# Allegro board B07_1020.brd
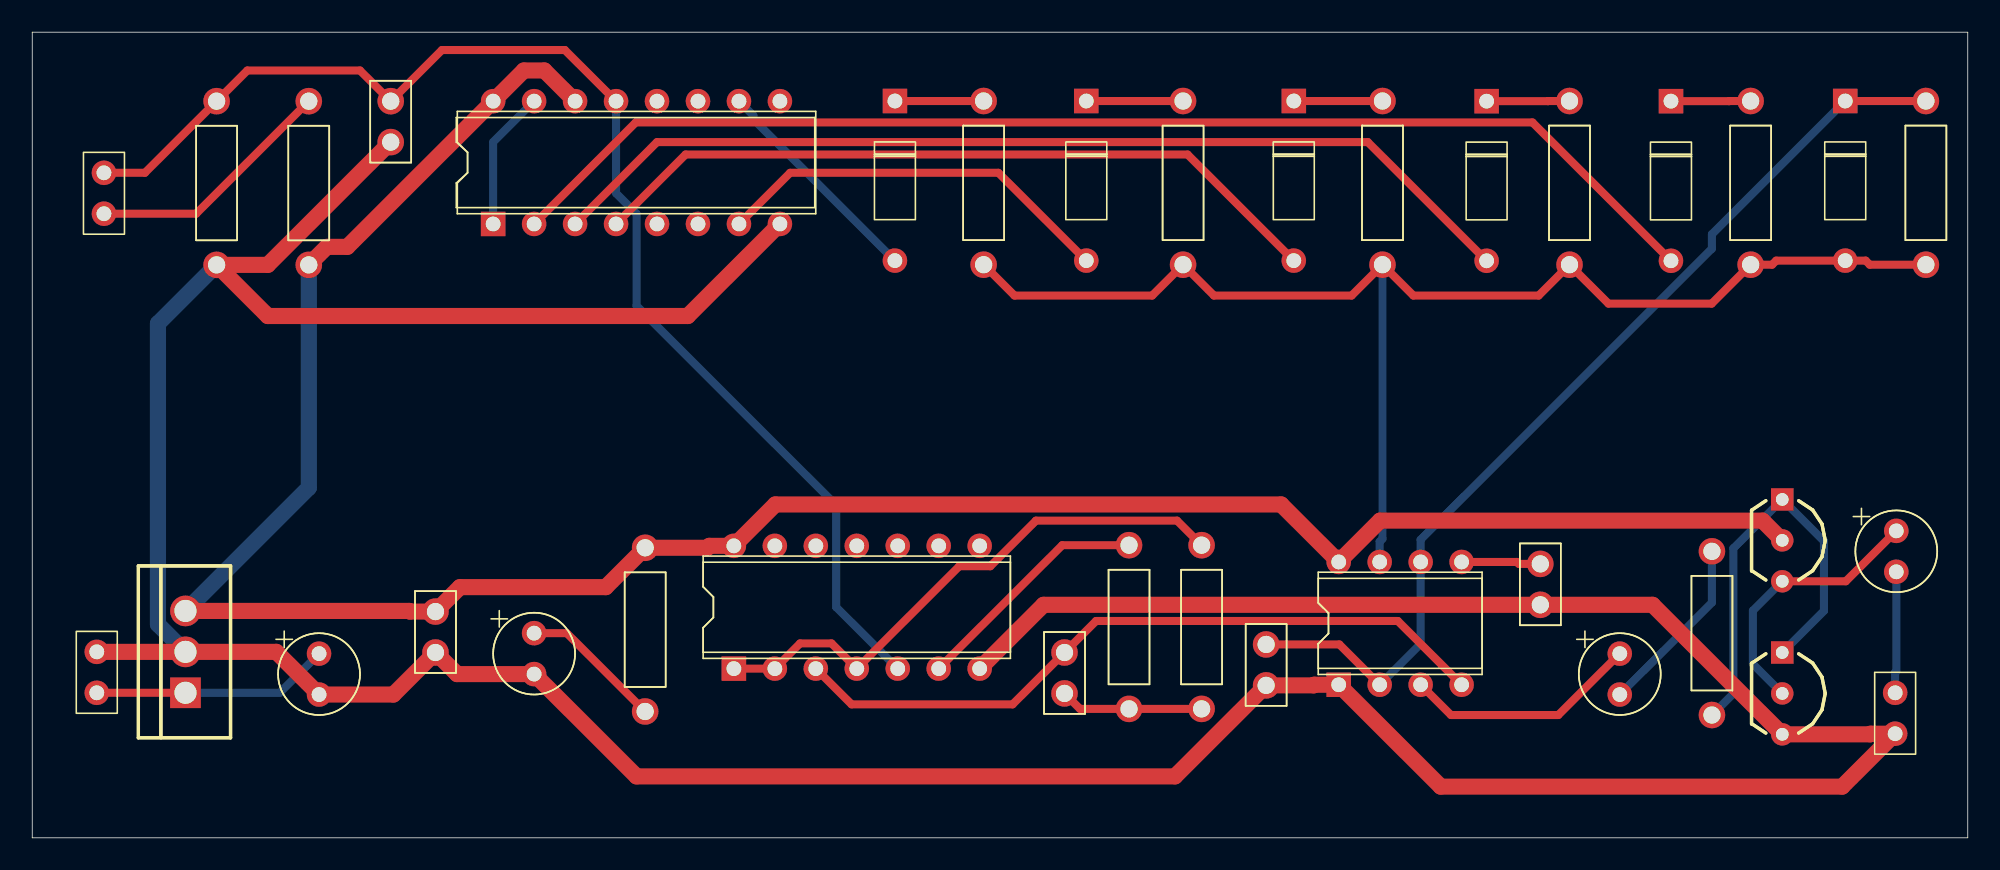
[diagram p0: board, top side]
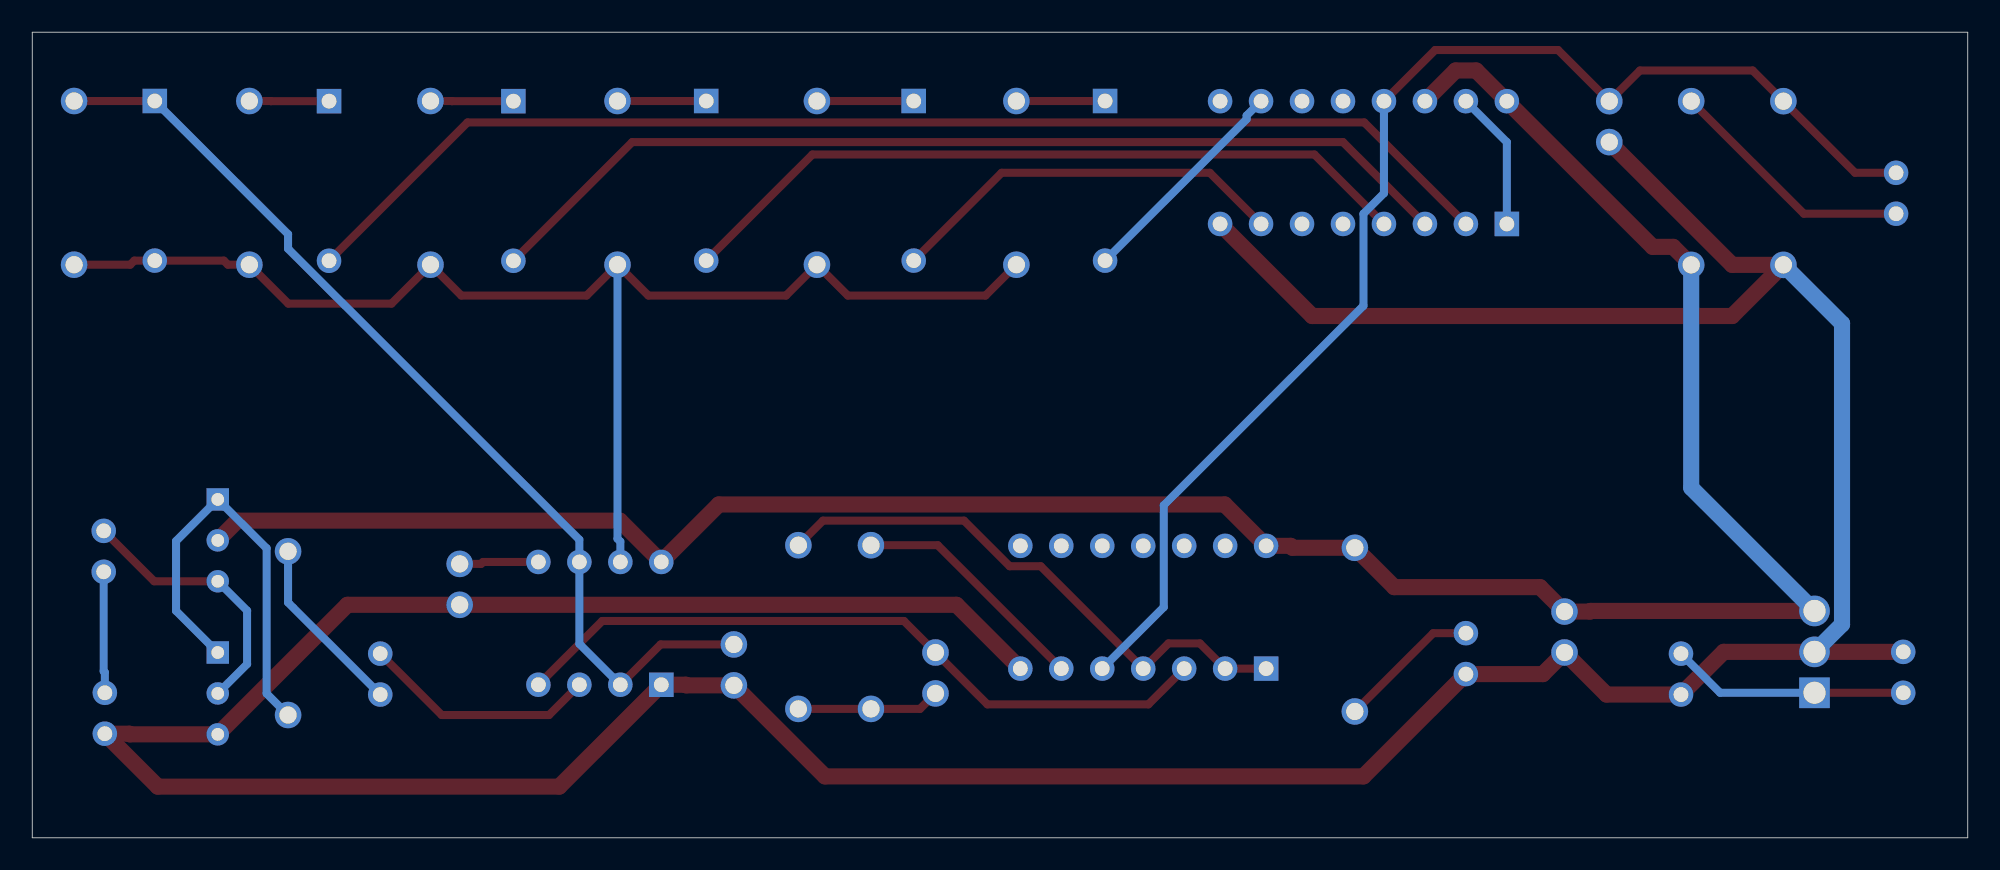
[diagram p1: board, bottom side, seen from below]

Outline 120 x 50 mm; copper layers: TOP, BOTTOM. Coordinates in mm from the lower left corner of the outline.
Outline path: 0,50 0,0 120,0 120,50 0,50

## Design rules (mm)
constraint set DEFAULT: min track width 0.5
nets with their own width: min track width 1; nets GND VCC

## Placement (name value [footprint] x y rotation side)
C1  0.47uF  [CAPCK05]  64 11.5 180 top
C2  47uF  [CAP196]  98.42 11.43 180 top
C3  100uF  [CAP196]  115.57 19.05 180 top
C4  0.01uF  [CAPCK05]  76.5 12 180 top
C5  0.01uF  [CAPCK05]  93.5 17 180 top
C6  0.01uF  [CAPCK05]  22.23 45.72 180 top
C7  0.1uF  [CAPCK05]  25 11.5 0 top
C8  220uF  [CAP196]  17.78 11.43 180 top
D1  1S1588  [DO41]  90.17 45.72 180 top
D2  1S1588  [DO41]  101.6 45.72 180 top
D3  1S1588  [DO41]  112.41 45.73 180 top
D4  1S1588  [DO41]  78.22 45.73 180 top
D5  1S1588  [DO41]  65.35 45.73 180 top
D6  1S1588  [DO41]  53.48 45.73 180 top
D7  LED  [CAP196]  31.11 12.7 180 top
J1  CON2  [JUMPER2]  115.5 9 270 top
J2  CON2  [JUMPER2]  4 9 90 top
NOREF  -  []  7.11 0 90 top
NOREF#2  -  []  0 22.95 0 top
Q1  2SC1815  [TO92100]  108.5 21 270 top
Q2  2SC1815  [TO92100]  108.5 11.5 270 top
R1  1M  [RES400]  72.5 8 0 top
R2  1M  [RES400]  68 8 0 top
R3  10k  [RES400]  17.14 35.56 0 top
R4  300k  [RES400]  95.31 45.73 180 top
R5  200k  [RES400]  106.54 45.73 180 top
R6  100k  [RES400]  117.41 45.73 180 top
R7  100k  [RES400]  83.72 45.73 180 top
R8  30  [RES400]  104.14 7.62 0 top
R9  56k  [RES400]  71.35 45.73 180 top
R10  22k  [RES400]  58.98 45.73 180 top
R11  300k  [RES400]  11.43 45.72 180 top
R12  330  [RES400]  38 18 180 top
SW1  SW PB  [JUMPER2]  4.45 41.27 270 top
U1  4011  [DIP14_3]  43.5 10.5 90 top
U2  MC1455  [DIP8_3]  81 9.5 90 top
U3  14017  [DIP16_3]  28.57 38.1 90 top
U4  LM7805/TO  [TO220AB]  9.5 9 90 top

## Library data of the parts
C1 C4-C7 = CAP NP: Tolerance: ***; User Part Number: ***
C2 C3 C8 = CAP POL: Tolerance: ***; User Part Number: ***
D1-D6 = DIODE
D7 = LED_0: Tolerance: ***; User Part Number: ***
J1 J2 = CON2: User Part Number: ***
Q1 Q2 = NPN BCE
R1-R12 = R: Tolerance: ***; User Part Number: ***
SW1 = SW TACT-SPST: User Part Number: ***
U1 = 4011_0: Tolerance: ***; User Part Number: ***
U2 = MC1455_1: Tolerance: ***; User Part Number: ***
U3 = 14017_0: Tolerance: ***; User Part Number: ***
U4 = LM7805/TO_1

## Footprints (pads in the part's own frame, mm; a bottom-side part is the same pattern mirrored in y, then rotated)
CAP196
  round 1.524 hole 0.914: 1(0,0) 2(0,2.54)
CAPCK05
  round 1.651 hole 1.067: 1(0,0) 2(0,2.54)
DIP8_3
  rect 1.524x1.524 hole 0.914: 1(0,0)
  round 1.524 hole 0.914: 2(0,-2.54) 3(0,-5.08) 4(0,-7.62) 5(7.62,-7.62) 6(7.62,-5.08) 7(7.62,-2.54) 8(7.62,0)
DIP14_3
  rect 1.524x1.524 hole 0.914: 1(0,0)
  round 1.524 hole 0.914: 2(0,-2.54) 3(0,-5.08) 4(0,-7.62) 5(0,-10.16) 6(0,-12.7) 7(0,-15.24) 8(7.62,-15.24) 9(7.62,-12.7) 10(7.62,-10.16) 11(7.62,-7.62) 12(7.62,-5.08) 13(7.62,-2.54) 14(7.62,0)
DIP16_3
  rect 1.524x1.524 hole 0.914: 1(0,0)
  round 1.524 hole 0.914: 2(0,-2.54) 3(0,-5.08) 4(0,-7.62) 5(0,-10.16) 6(0,-12.7) 7(0,-15.24) 8(0,-17.78) 9(7.62,-17.78) 10(7.62,-15.24) 11(7.62,-12.7) 12(7.62,-10.16) 13(7.62,-7.62) 14(7.62,-5.08) 15(7.62,-2.54) 16(7.62,0)
DO41
  rect 1.524x1.524 hole 0.914: 1(0,0)
  round 1.524 hole 0.914: 2(0,9.906)
JUMPER2
  round 1.524 hole 0.914: 1(0,0) 2(2.54,0)
RES400
  round 1.651 hole 1.067: 1(0,0) 2(0,10.16)
TO220AB
  rect 1.905x1.905 hole 1.372: 1(0,0)
  round 1.905 hole 1.372: 2(2.54,0) 3(5.08,0)
TO92100
  rect 1.397x1.397 hole 0.787: 1(0,0)
  round 1.397 hole 0.787: 2(2.54,0) 3(5.08,0)

## Nets
GND: C4.2 C5.2 C6.2 C7.1 C8.2 D7.2(CATHODE) J1.2 J2.2 Q2.3(E) R11.2 U1.7 U2.1 U3.8 U4.2
VCC: C7.2 Q1.2 R3.1 R12.1 U1.14 U2.8 U3.14 U3.16 U4.3
RESET: C6.1 R11.1 SW1.1 U1.5 U3.13
N01145: R3.2 SW1.2
N01199: D1.2 U3.3
N01203: D2.2 U3.2
N01210: D4.2 U3.4
N01222: D5.2 U3.7
N01265: D6.2 U3.10
N01506: U3.1 U3.15(RST)
N01518: D1.1(K) R4.1
N01522: D2.1(K) R5.1
N01532: D4.1(K) R7.1
N01536: D5.1(K) R9.1
N01540: D6.1(K) R10.1
N01544: D3.2 R4.2 R5.2 R6.2 R7.2 R9.2 R10.2 U2.7
N01614: C4.1 D3.1(K) R6.1 U2.2(TRG) U2.6
N01736: C1.1 U1.3 U2.4
N01889: C1.2 R1.1 R2.1
N01902: R1.2 U1.1 U1.2 U1.4
N02017: R2.2 U1.6
N02049: C2.1 U2.3
N02053: C2.2 R8.2
N02057: Q1.1 Q2.1 R8.1
N02068: C3.1 Q1.3(E) Q2.2
N02118: C3.2 J1.1
N02146: C5.1 U2.5
N02219: C8.1 J2.1 U4.1(VIN)
N02342: D7.1 R12.2

Pads without a net: U1 8 9 10 11 12 13; U3 5 6 9 11 12

## Routing (per net, layer and track width the routed paths; a pad name or vN(x,y) marks a point on that pad's centre or on a via; arc(x,y) is an arc through that point)
GND: length 263.7
  TOP w1: J2.2 U4.2 15.13,11.54 C8.2 22.39,8.89 C7.1 26.34,10.16 D7.2 37.47,3.81 70.85,3.81 C4.2 79.44,9.46 79.48,9.5 U2.1 87.33,3.17 112.22,3.17 J1.2 113.98,6.46 113.94,6.42 Q2.3 100.46,14.46 C5.2 62.7,14.46 U1.7 ; U3.8 40.64,32.38 14.61,32.38 R11.2 14.61,35.56 C6.2
  BOTTOM w1: U4.2 7.79,13.25 7.79,31.92 R11.2
VCC: length 151.8
  TOP w1: U3.14 31.75,47.62 30.48,47.62 U3.16 19.53,36.68 18.26,36.68 R3.1 ; U4.3 23.38,14.08 23.42,14.04 C7.2 26.52,15.56 35.56,15.56 R12.1 41.86,18 41.98,18.12 U1.14 46.07,20.69 77.43,20.69 U2.8 83.56,19.68 107.28,19.68 Q1.2
  BOTTOM w1: U4.3 17.14,21.73 R3.1
RESET: length 80.3
  TOP w0.5: U3.13 33.02,48.9 25.4,48.9 C6.1 20.32,47.62 13.34,47.62 R11.1 6.99,41.27 SW1.1
  BOTTOM w0.5: U3.13 36.2,40.01 37.47,38.73 37.47,33.02 49.85,20.64 49.85,14.31 U1.5
N01145: length 15.6
  TOP w0.5: SW1.2 10.16,38.73 R3.2
N01199: length 61.7
  TOP w0.5: D1.2 82.8,43.18 38.73,43.18 U3.3
N01203: length 76.7
  TOP w0.5: U3.2 37.42,44.4 93.01,44.4 D2.2
N01210: length 46.5
  TOP w0.5: D4.2 71.63,42.41 40.51,42.41 U3.4
N01222: length 25.1
  TOP w0.5: U3.7 46.99,41.27 59.9,41.27 D5.2
N01265: length 13.9
  BOTTOM w0.5: D6.2 44.71,44.6 44.71,44.82 U3.10
N01506: length 8.7
  BOTTOM w0.5: U3.15 28.57,43.18 U3.1
N01518: length 5.1
  TOP w0.5: D1.1 93.97,45.72 93.98,45.73 R4.1
N01522: length 4.9
  TOP w0.5: R5.1 105.21,45.73 105.2,45.72 D2.1
N01532: length 5.5
  TOP w0.5: D4.1 R7.1
N01536: length 6
  TOP w0.5: D5.1 R9.1
N01540: length 5.5
  TOP w0.5: D6.1 R10.1
N01544: length 83.9
  TOP w0.5: R6.2 113.92,35.57 113.67,35.82 D3.2 108.12,35.82 107.87,35.57 R5.2 104.12,33.16 97.72,33.16 R4.2 93.39,33.66 85.63,33.66 R7.2 81.8,33.66 73.27,33.66 R9.2 69.44,33.66 60.9,33.66 R10.2
  BOTTOM w0.5: U2.7 83.54,18.39 83.72,18.56 R7.2
N01614: length 61.3
  TOP w0.5: U2.2 81.04,12 C4.1 ; D3.1 R6.1
  BOTTOM w0.5: U2.2 86.08,12.04 U2.6 86.08,18.5 104.14,36.56 104.14,37.47 D3.1
N01736: length 44.7
  TOP w0.5: U1.3 50.8,8.28 60.78,8.28 C1.1 65.96,13.46 84.66,13.46 U2.4
N01889: length 8.9
  TOP w0.5: R1.1 R2.1 64.96,8 C1.2
N01902: length 34.7
  TOP w0.5: R1.2 70.97,19.68 62.23,19.68 59.4,16.85 57.47,16.85 U1.4 49.55,12.06 47.6,12.06 U1.2 U1.1
N02017: length 15
  TOP w0.5: U1.6 63.86,18.16 R2.2
N02049: length 14.7
  TOP w0.5: C2.1 94.61,7.62 87.96,7.62 U2.3
N02053: length 11.3
  BOTTOM w0.5: R8.2 104.14,14.61 C2.2
N02057: length 26.8
  BOTTOM w0.5: Q2.1 111.08,14.09 111.08,18.41 Q1.1 105.47,17.97 105.47,8.95 R8.1
N02068: length 16.8
  TOP w0.5: Q1.3 112.44,15.92 C3.1
  BOTTOM w0.5: Q2.2 106.68,10.78 106.68,14.1 Q1.3
N02118: length 7.5
  BOTTOM w0.5: J1.1 115.5,10.27 115.57,10.34 C3.2
N02146: length 4.9
  TOP w0.5: U2.5 92.05,17.12 92.17,17 C5.1
N02219: length 14.8
  TOP w0.5: J2.1 U4.1
  BOTTOM w0.5: C8.1 15.35,9 U4.1
N02342: length 8.9
  TOP w0.5: R12.2 33.14,12.7 D7.1

## Text on the board
COMPVAL_TYPE_TOP: FIGURE | FINISHED_SIZE | 0.7874 | 0.9144 | 1.0668 | 1.3716 | DRILL CHART: TOP to BOTTOM | ALL UNITS ARE IN MILLIMETERS | PLATED | QTY | 6 | 64 | 34 | 3
